# EAGLE board Electrical (EAGLE 9.6.2)
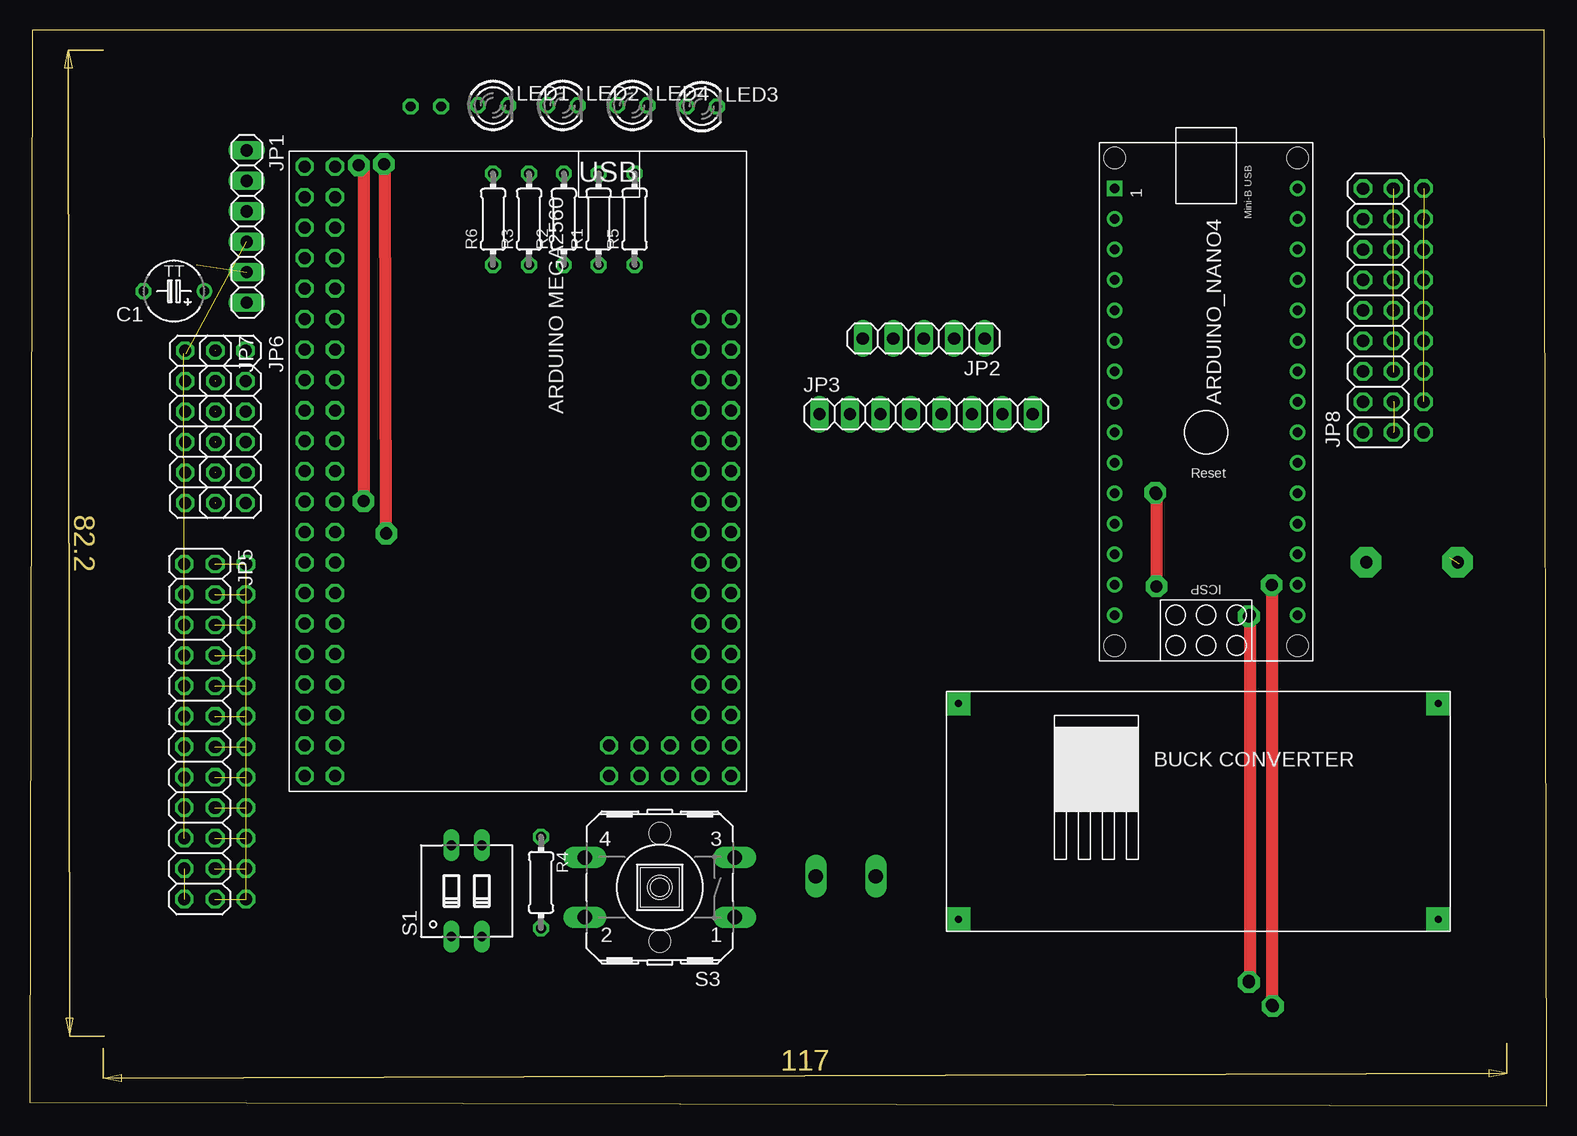
[diagram p0: board, top side]
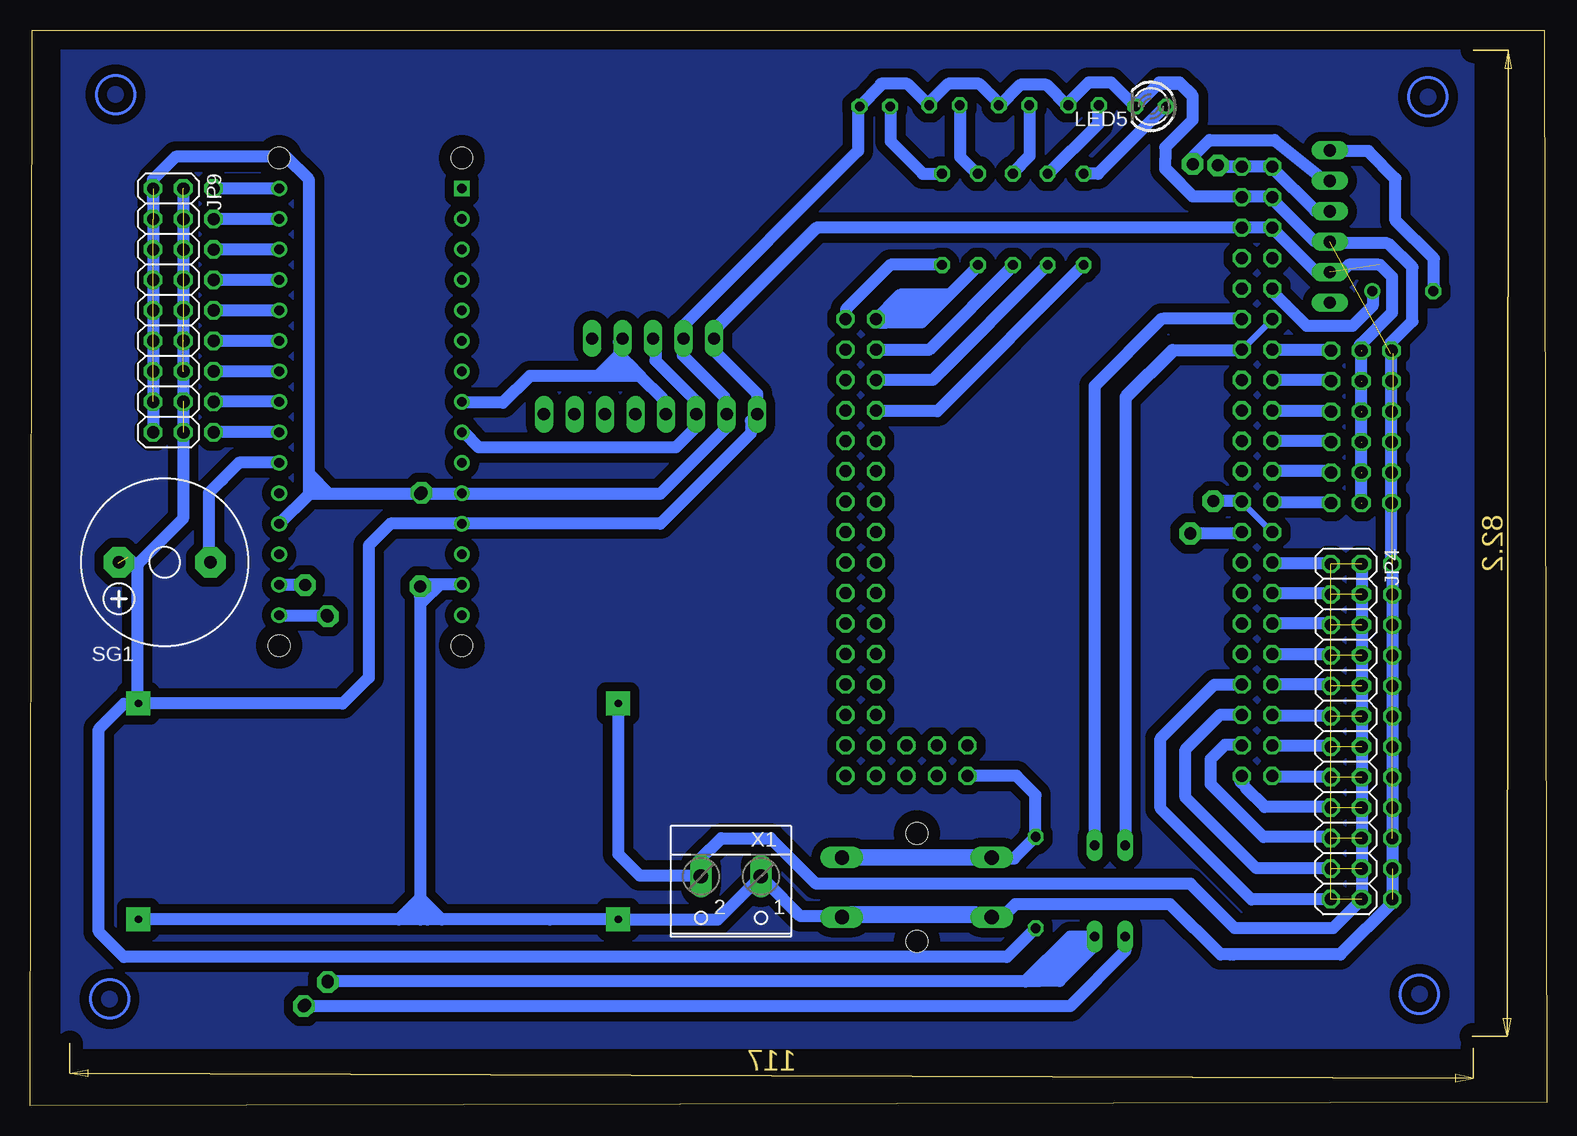
[diagram p1: board, bottom side, seen from below]

Size 126.43 x 89.68 mm. Coordinates in mm from the lower left corner, seen from the top.
Outline: 0,0.3 126.43,0 126.23,89.68 0.2,89.68 0,0.3
Copper layers (1*16): Top 0.035mm / dielectric 1.5mm / Bottom 0.035mm
Design rules "default *": minimum track width 6mil, minimum drill 0.35mm, track to track 30mil, track to pad 30mil, pad to pad 6mil, via to via 6mil, smd to smd 6mil, copper to edge 40mil, drill to drill 6mil, minimum pad ring 10mil, minimum via ring 8mil, stop-mask expansion 4mil, vias tented up to drill 0mil, thermal gap 10mil

## Footprints (pad centres in the part's own frame; a part is rotated, then mirrored left to right if it is on the bottom)
ARDUINO_NANO = drill 0.8 square: 1 -20.32,-7.62 | drill 0.8: 2 -17.78,-7.62; 3 -15.24,-7.62; 4 -12.7,-7.62; 5 -10.16,-7.62; 6 -7.62,-7.62; 7 -5.08,-7.62; 8 -2.54,-7.62; 9 0,-7.62; 10 2.54,-7.62; 11 5.08,-7.62; 12 7.62,-7.62; 13 10.16,-7.62; 14 12.7,-7.62; 15 15.24,-7.62; 16 15.24,7.62; 17 12.7,7.62; 18 10.16,7.62; 19 7.62,7.62; 20 5.08,7.62; 21 2.54,7.62; 22 0,7.62; 23 -2.54,7.62; 24 -5.08,7.62; 25 -7.62,7.62; 26 -10.16,7.62; 27 -12.7,7.62; 28 -15.24,7.62; 29 -17.78,7.62; 30 -20.32,7.62 | hole 1.778: -22.86,-7.62; -22.86,7.62; 17.78,7.62; 17.78,-7.62
TAP5-50 = drill 0.813: + -2.54,0 | drill 0.813 octagon: - 2.54,0
1X06 = drill 1.016 long: 1 -6.35,0; 2 -3.81,0; 3 -1.27,0; 4 1.27,0; 5 3.81,0; 6 6.35,0
1X05 = drill 1.016 long: 1 -5.08,0; 2 -2.54,0; 3 0,0; 4 2.54,0; 5 5.08,0
1X08 = drill 1.016 long: 1 -8.89,0; 2 -6.35,0; 3 -3.81,0; 4 -1.27,0; 5 1.27,0; 6 3.81,0; 7 6.35,0; 8 8.89,0
2X12 = drill 1.016 octagon: 1 -13.97,-1.27; 2 -13.97,1.27; 3 -11.43,-1.27; 4 -11.43,1.27; 5 -8.89,-1.27; 6 -8.89,1.27; 7 -6.35,-1.27; 8 -6.35,1.27; 9 -3.81,-1.27; 10 -3.81,1.27; 11 -1.27,-1.27; 12 -1.27,1.27; 13 1.27,-1.27; 14 1.27,1.27; 15 3.81,-1.27; 16 3.81,1.27; 17 6.35,-1.27; 18 6.35,1.27; 19 8.89,-1.27; 20 8.89,1.27; 21 11.43,-1.27; 22 11.43,1.27; 23 13.97,-1.27; 24 13.97,1.27
2X06 = drill 1.016 octagon: 1 -6.35,-1.27; 2 -6.35,1.27; 3 -3.81,-1.27; 4 -3.81,1.27; 5 -1.27,-1.27; 6 -1.27,1.27; 7 1.27,-1.27; 8 1.27,1.27; 9 3.81,-1.27; 10 3.81,1.27; 11 6.35,-1.27; 12 6.35,1.27
2X09 = drill 1.016 octagon: 1 -10.16,-1.27; 2 -10.16,1.27; 3 -7.62,-1.27; 4 -7.62,1.27; 5 -5.08,-1.27; 6 -5.08,1.27; 7 -2.54,-1.27; 8 -2.54,1.27; 9 0,-1.27; 10 0,1.27; 11 2.54,-1.27; 12 2.54,1.27; 13 5.08,-1.27; 14 5.08,1.27; 15 7.62,-1.27; 16 7.62,1.27; 17 10.16,-1.27; 18 10.16,1.27
LED3MM = drill 0.813 octagon: A -1.27,0; K 1.27,0
0204/7 = drill 0.813 octagon: 1 -3.81,0; 2 3.81,0
DIP02YL = drill 0.813 long: 1 -1.27,-3.81; 2 1.27,-3.81; 3 1.27,3.81; 4 -1.27,3.81
B3F-40XX = drill 1.194 long: 1 -6.248,2.489; 2 6.248,2.489; 3 -6.248,-2.489; 4 6.248,-2.489 | hole 1.803: 0,-4.496; 0,4.496
F/CM12P = drill 1.016 pad 2.54 octagon: + 3.81,0; - -3.81,0
BUCK_CONV = drill 0.6 pad 2 square: IN+ -17,48; IN- -17,30; OUT+ 23,48; OUT- 23,30
MEGA2560_MIKRO = drill 1 octagon: 3V3.1 -26.67,-17.78; 3V3.2 -26.67,-20.32; +5V.1 -29.21,-17.78; +5V.2 -29.21,-20.32; A0 -21.59,15.24; A1 -21.59,12.7; A2 -19.05,15.24; A3 -19.05,12.7; A4 -16.51,15.24; A5 -16.51,12.7; A6 -13.97,15.24; A7 -13.97,12.7; A8 -11.43,15.24; A9 -11.43,12.7; A10 -8.89,15.24; A11 -8.89,12.7; A12 -6.35,15.24; A13 -6.35,12.7; A14 -3.81,15.24; A15 -3.81,12.7; AREF.1 -24.13,-17.78; D2 -19.05,-17.78; D3 -19.05,-20.32; D4 -16.51,-17.78; D5 -16.51,-20.32; D6 -13.97,-17.78; D7 -13.97,-20.32; D8 -11.43,-17.78; D9 -11.43,-20.32; D10 -8.89,-17.78; D11 -8.89,-20.32; D12 -6.35,-17.78; D13 -6.35,-20.32; D14 -3.81,-17.78; D15 -3.81,-20.32; D16 -1.27,-17.78; D17 -1.27,-20.32; D18 1.27,-17.78; D19 1.27,-20.32; D20 3.81,-17.78; D21 3.81,-20.32; D22 6.35,-17.78; D23 6.35,-20.32; D24 8.89,-17.78; D25 8.89,-20.32; D26 11.43,-17.78; D27 11.43,-20.32; D28 13.97,-17.78; D29 13.97,-20.32; D30 16.51,-17.78; D31 16.51,-20.32; D32 -1.27,15.24; D33 -1.27,12.7; D34 1.27,15.24; D35 1.27,12.7; D36 3.81,15.24; D37 3.81,12.7; D38 6.35,15.24; D39 6.35,12.7; D40 8.89,15.24; D41 8.89,12.7; D42 11.43,15.24; D43 11.43,12.7; D44 13.97,15.24; D45 13.97,12.7; D46 16.51,15.24; D47 16.51,12.7; D48 16.51,10.16; D49 13.97,10.16; D50 16.51,7.62; D51 13.97,7.62; D52 16.51,5.08; D53 13.97,5.08; GND.1 -31.75,-17.78; GND.2 -31.75,-20.32; RST -24.13,-20.32; RX -21.59,-17.78; TX -21.59,-20.32; VIN.1 -34.29,-17.78; VIN.2 -34.29,-20.32
W237-102 = drill 1.194 long: 1 -2.5,-1.27; 2 2.5,-1.27

## Placement (x,y rotation side)
ARDUINO_NANO4  [ARDUINO_NANO]  98.04,56.14 270 top
C1  [TAP5-50]  12,67.9 180 top
JP1  [1X06]  18.07,73.29 270 top
JP2  [1X05]  74.5,63.96 180 top
JP3  [1X08]  74.7,57.65 0 top
JP4  [2X12]  16.73,31.19 270 bottom
JP5  [2X12]  14.13,31.19 270 top
JP6  [2X06]  16.7,56.6 270 top
JP7  [2X06]  14.2,56.6 270 top
JP8  [2X09]  112.4,66.3 90 top
JP9  [2X09]  114.9,66.3 270 bottom
LED1  [LED3MM]  38.6,83.4 0 top
LED2  [LED3MM]  44.4,83.4 0 top
LED3  [LED3MM]  56,83.3 0 top
LED4  [LED3MM]  50.2,83.4 0 top
LED5  [LED3MM]  33,83.3 180 bottom
R1  [0204/7]  47.4,73.9 90 top
R2  [0204/7]  44.5,73.9 90 top
R3  [0204/7]  41.6,73.9 90 top
R4  [0204/7]  42.6,18.6 270 top
R5  [0204/7]  50.4,73.9 90 top
R6  [0204/7]  38.6,73.9 90 top
S1  [DIP02YL]  36.4,17.9 0 top
S3  [B3F-40XX]  52.5,18.2 180 top
SG1  F/CM12P  [F/CM12P]  115.2,45.3 180 bottom
U$1  BUCK_CONV  [BUCK_CONV]  94.39,-14.47 0 top
U$2  MEGA2560_MIKRO  [MEGA2560_MIKRO]  43.2,44 270 top
X1  [W237-102]  68,17.85 180 bottom

## Library data of the parts
ARDUINO_NANO4 = ArduinoNanoV30
C1 = rcl; SPICEPREFIX: C
JP1-JP9 = pinhead
LED1-LED5 = led
R1-R6 = rcl; SPICEPREFIX: R
S1 = switch-dil; OC_FARNELL: unknown; OC_NEWARK: unknown
S3 = switch-omron; MF: OMRON COMPONENTS USA; MPN: B3F-4000; OC_FARNELL: 176434; OC_NEWARK: 36K3105
SG1 = buzzer; OC_FARNELL: unknown; OC_NEWARK: unknown
U$1 = KRSBI COMPONENT
U$2 = MIKRO_MEGA2560
X1 = con-wago-500; MPN: 237-102; OC_FARNELL: unknown; OC_NEWARK: 70K9898

## Nets
GND: ARDUINO_NANO4.14 ARDUINO_NANO4.19 JP1.4 JP2.4 JP3.2 JP5.1 JP5.3 JP5.5 JP5.7 JP5.9 JP5.11 JP5.13 JP5.15 JP5.17 JP5.19 JP5.21 JP5.23 JP9.1 JP9.3 JP9.5 JP9.7 JP9.9 JP9.11 JP9.13 JP9.15 JP9.17 U$1.IN- U$1.OUT- X1.1
N$1: JP6.1 JP7.2
N$2: JP4.8
N$3: JP6.3 JP7.4
N$4: JP4.3 JP5.4
N$5: JP6.5 JP7.6
N$6: JP6.7 JP7.8
N$7: JP6.9 JP7.10
N$8: JP6.11 JP7.12
N$9: ARDUINO_NANO4.9 JP2.3 JP3.3
N$17: JP4.5 JP5.6
N$18: JP4.7 JP5.8
N$19: JP4.9 JP5.10
N$20: JP4.11 JP5.12
N$21: JP4.13 JP5.14
N$22: JP4.15 JP5.16
N$23: JP4.17 JP5.18
N$24: JP4.19 JP5.20
N$25: JP4.21 JP5.22
N$27: ARDUINO_NANO4.8 JP2.2 JP3.4
N$31: ARDUINO_NANO4.22 JP8.2
N$32: ARDUINO_NANO4.23 JP8.4
N$33: ARDUINO_NANO4.24 JP8.6
N$34: ARDUINO_NANO4.25 JP8.8
N$35: ARDUINO_NANO4.26 JP8.10
N$36: ARDUINO_NANO4.27 JP8.12
N$37: ARDUINO_NANO4.28 JP8.14
N$38: ARDUINO_NANO4.29 JP8.16
N$39: ARDUINO_NANO4.30 JP8.18
N$40: S1.4 U$2.TX
N$41: S1.3 U$2.RX
N$42: ARDUINO_NANO4.17 S1.1
N$43: ARDUINO_NANO4.16 S1.2
VCC: ARDUINO_NANO4.12 JP1.5 JP2.5 JP3.1 JP8.1 JP8.3 JP8.5 JP8.7 JP8.9 JP8.11 JP8.13 JP8.15 JP8.17 JP9.2 JP9.4 JP9.6 JP9.8 JP9.10 JP9.12 JP9.14 JP9.16 JP9.18 U$1.OUT+
VDD: JP4.1 JP4.23 JP5.2 JP5.24 U$1.IN+ X1.2
VIN: ARDUINO_NANO4.15

## Tracks (layer width: path | path; a pad name or v marks a point on that pad's centre or on a via)
A
  pour Bottom: 6.1,88 6.1,4.8 123.8,4.8 123.8,88
GND  (via drill 0.35, 1, 1 pad 1.8)  (19 unrouted)
  Top 1.016: v93.9,51 v93.9,43.4
  Bottom 0.508: JP1.4 19.17,72.02 22.95,75.8 29.1,75.8 31.5,78.2 31.5,78.1 31.9,78.5 31.9,79.8 29.6,82.1 29.6,83.9 30.6,84.9 32.8,84.9 34.2,83.5 34.2,83.2 34.5,83.2 36.6,85.3 38.1,85.3 40,83.4 41.7,85.1 43.8,85.1 45.5,83.4 45.7,83.4 45.7,83.6 47.2,85.1 49.9,85.1 51.4,83.6 53.1,85.3 55.2,85.3 57.3,83.2 57.3,79.7 71.96,65.04 JP2.4 | 75.6,15.53 83.1,15.53 | U$1.IN- 92.1,15.53
  Bottom 1.016: JP5.1 JP5.23 | X1.1 69.09,15.53 75.6,15.53 U$1.IN- 83.1,15.53 92.1,15.53 | JP9.17 JP9.1 116.17,77.23 114.3,79.1 105.1,79.1 103.18,77.18 103.18,52.68 | JP2.4 72.03,63.89 72.03,62.57 68.55,59.09 68.55,57.85 JP3.2 68.35,56.55 73.9,51 v93.9,51 101.5,51 | 12.8,62.7 13,62.7 | 92.1,15.53 93.3,15.53 | 93.3,15.53 93.9,15.53 | 93.9,15.53 95.7,15.53 | 95.7,15.53 U$1.OUT- | ARDUINO_NANO4.14 92.3,43.44 | 93.9,17.33 93.9,42.1 93.64,42.1 | 93.9,17.33 93.9,15.53 | 92.1,15.53 93.9,17.33 | 95.7,15.53 94.87,16.37 | 94.87,16.37 93.9,17.33 | 93.3,15.53 94.14,16.37 94.87,16.37 | ARDUINO_NANO4.19 103.18,51 | 101.5,51 103.18,51 | 103.18,51 103.18,52.68 | 101.5,51 103.18,52.68 | 93.64,42.1 92.3,43.44 | 93.64,42.1 93.9,42.36 v93.9,43.3 v93.9,43.4 93.86,43.44 92.3,43.44
N$1  (1 unrouted)
N$3  (1 unrouted)
N$4  (1 unrouted)
N$5  (1 unrouted)
N$6  (1 unrouted)
N$7  (1 unrouted)
N$8  (1 unrouted)
N$9
  Bottom 1.016: JP2.3 74.3,63.76 74.3,62.12 70.92,58.74 70.92,57.68 JP3.3 70.92,57.62 70.92,56.56 72.6,54.88 89.02,54.88 90.28,56.14 ARDUINO_NANO4.9
N$10
  Bottom 1.016: 18,63 23,63 23.1,63.1
N$11
  Bottom 1.016: 18,60.5 22.9,60.5
N$12
  Bottom 1.016: 18,57.9 22.9,57.9 23,58
N$13
  Bottom 1.016: 18,55.4 22.9,55.4
N$14
  Bottom 1.016: 17.9,52.8 18,52.9 22.9,52.9
N$15
  Bottom 1.016: 17.9,50.1 18,50.2 18,50.3 23,50.3
N$16
  Bottom 1.016: 15.4,63 15.5,62.9 15.5,50.3 15.4,50.2
N$17  (1 unrouted)
N$18  (1 unrouted)
N$19  (1 unrouted)
N$20  (1 unrouted)
N$21  (1 unrouted)
N$22  (1 unrouted)
N$23  (1 unrouted)
N$24  (1 unrouted)
N$25  (1 unrouted)
N$26
  Bottom 1.016: 15.4,45.2 15.4,17.2
N$27
  Bottom 1.016: JP3.4 73.66,57.88 73.66,58.94 75.56,60.84 | 76.61,61.89 77.34,62.62 77.34,63.66 JP2.2 77.07,63.93 77.07,62.87 78.05,61.89 | 76.61,61.89 75.56,60.84 | 75.56,60.84 77.8,60.84 | 77.8,60.84 78.8,60.84 | 78.8,60.84 84.76,60.84 87,58.6 90.34,58.6 ARDUINO_NANO4.8 | 78.8,60.84 78.8,61.14 78.05,61.89 | 76.61,61.89 77,61.89 | 77,61.89 78.05,61.89 | 77.8,60.84 77,61.64 77,61.89
N$28
  Bottom 1.016: 18,45.2 22.9,45.2 23,45.3
N$29
  Bottom 1.016: 18,42.6 18.1,42.7 22.9,42.7
N$30
  Bottom 1.016: 18,40 18,40.2 22.9,40.2
N$31
  Bottom 1.016: ARDUINO_NANO4.22 JP8.2
N$32
  Bottom 1.016: ARDUINO_NANO4.23 JP8.4
N$33
  Bottom 1.016: ARDUINO_NANO4.24 JP8.6
N$34
  Bottom 1.016: ARDUINO_NANO4.25 JP8.8
N$35
  Bottom 1.016: ARDUINO_NANO4.26 JP8.10
N$36
  Bottom 1.016: ARDUINO_NANO4.27 JP8.12
N$37
  Bottom 1.016: ARDUINO_NANO4.28 JP8.14
N$38
  Bottom 1.016: ARDUINO_NANO4.29 JP8.16
N$39
  Bottom 1.016: ARDUINO_NANO4.30 JP8.18
N$40
  Bottom 0.508: U$2.TX 25.47,63 30.7,63 35.1,58.6 35.1,21.74 S1.4
N$41
  Bottom 0.508: U$2.RX 32.11,65.59 37.7,60 37.7,21.74 S1.3
N$42  (via drill 0.35, 1, 1 pad 1.8)
  Top 1.016: v103.5,43.4 103.5,8.7 v103.9,8.3
  Bottom 1.016: S1.1 35.13,12.89 39.72,8.3 v103.6,8.3 v103.9,8.3 | v103.5,43.4 105.62,43.4 ARDUINO_NANO4.17
N$43  (via drill 0.35)
  Top 1.016: v101.8,10.3 101.7,10.4 101.7,40.72 v101.56,40.86
  Bottom 1.016: v101.8,10.3 101.8,10.35 43.45,10.35 39.71,14.09 S1.2 | ARDUINO_NANO4.16 105.62,40.86 v101.56,40.86
N$44
  Bottom 1.016: 18,37.6 22.9,37.6
N$45
  Bottom 1.016: 18,35.1 23,35.1
N$46
  Bottom 1.016: 18,32.5 23,32.5
N$47
  Bottom 1.016: 18,29.9 18.1,30 23,30
N$48
  Bottom 1.016: 18,27.4 22.9,27.4 23,27.5
N$49
  Bottom 1.016: 14,70.1 16.5,70.1 17.2,69.4 18.4,69.4
N$50
  Bottom 1.016: 13.3,71.9 18.3,71.9
N$51
  Bottom 1.016: 18,24.9 23.5,24.9 25.1,26.5
N$52
  Bottom 1.016: 17.9,22.2 18.1,22.4 23.6,22.4 28,26.8 28,28.9 26.8,30.1 25.5,30.1 25.4,30
N$53
  Bottom 1.016: 18,19.8 24.2,19.8 30.1,25.7 30.1,29.7 27.2,32.6 25.4,32.6
N$54
  Bottom 1.016: 18,17.2 24.6,17.2 32.2,24.8 32.2,30.6 27.7,35.1 25.4,35.1
N$55
  Bottom 1.016: 13,45 13,63.6 11.2,65.4 11.2,69.9 13.1,71.8
N$56
  Bottom 1.016: 14.5,68 14.5,66.7 16.2,65 20,65 22.9,67.9
N$57
  Bottom 1.016: 22.9,68.2 23,68.1
N$58
  Bottom 1.016: 9.4,68.3 9.4,70.6 12.6,73.8 12.6,77.3 14.8,79.5
N$59
  Bottom 1.016: 22.8,75.8 25.4,75.8 25.5,75.7
N$60
  Bottom 1.016: 18.4,79.6 14.87,79.6
N$61  (via drill 1 pad 1.8)
  other vias: 27.4,78.4
N$62
  Bottom 1.016: 22.9,73.1 23,73.2 | 22.9,73.2 23,73.2 | 23,73.2 60.9,73.2 69.5,64.6 69.5,63.7
N$63
  Bottom 1.016: 19.1,69.6 19.2,69.5 22.9,73.2 22.9,73.3
N$64
  Bottom 1.016: 48.9,83.4 48.9,79.1 47.4,77.6
N$65
  Bottom 1.016: 43.1,83.4 43.1,79.2 44.5,77.8
N$66
  Bottom 1.016: 17.6,72 18.8,72 18.9,72.1 19.4,72.1 23,75.7
N$67
  Bottom 1.016: 17.8,69.6 18.3,69.6
N$68
  Bottom 1.016: 37.4,83.3 37.4,81.8 41.6,77.6
N$69
  Bottom 1.016: 54.7,83.3 54.7,80.4 52,77.7 50.5,77.7
N$70
  Bottom 0.508: 39.2,84.2 39.2,84 39.9,83.3
  Bottom 1.016: 39.9,83.3 41.7,85.1 43.9,85.1 45.7,83.3
N$71
  Bottom 1.016: 45.7,83.6 47.3,85.2 49.9,85.2 51.6,83.5 51.6,83.4
N$72
  Bottom 1.016: 51.5,83.4 53.3,85.2 55.5,85.2 55.5,85.1 57.3,83.3
N$73
  Bottom 1.016: 50.4,70.1 54.7,70.1 58.4,66.4 58.4,65.5
N$74
  Bottom 1.016: 47.3,70.1 49.8,67.6 53.9,67.6 56,65.5
N$75
  Bottom 1.016: 44.4,70.1 51.5,63 56,63
N$76
  Bottom 1.016: 41.6,70.1 51.2,60.5 56,60.5
N$77
  Bottom 1.016: 49.9,67.5 52.1,65.3 55,65.3 | 55.7,65.3 55,65.3 | 55,65.3 53.3,67 51.1,67 52.1,66 53.3,66
N$78
  Bottom 1.016: 65.5,19 65.5,19.1
N$79
  Bottom 1.016: 12.8,17 17.2,12.6 26.4,12.6
N$80
  Bottom 1.016: 26.1,12.6 27.2,12.6 31.4,16.8 44.3,16.8 45.4,15.7 58.8,15.7 58.9,15.8 62.2,15.8 65,18.6
N$81
  Bottom 1.016: 58.7,20.5 58.9,20.7 58.7,20.9 46.4,20.9 46.1,20.6 44.4,20.6 42.6,22.4 42.6,25.9 44.2,27.5 48.5,27.5
N$82
  Bottom 1.016: 42.6,14.8 45,12.4 118.6,12.4 120.7,14.5 120.7,31.4 118.6,33.5 117.1,33.5
N$83
  Bottom 1.016: 37.6,13.4 40.6,10.4 42.3,10.4 | 43.9,10.4 42.3,10.4 | 42.3,10.4 39.2,13.5 38.3,13.5 40.8,11 41.2,11
N$84
  Bottom 1.016: 116.2,76.9 116.2,75.2
N$85  (via drill 1)
  other vias: 101.7,40.9
N$86
  Bottom 1.016: 18.4,77.1 18.1,77.1
N$87  (via drill 1 pad 1.8)
  Bottom 1.016: 25.4,47.7 v29.7,47.7
N$88
  Bottom 1.016: 105.7,53.6 109,53.6 109.5,53.1 110.4,52.2 111.5,51.1 111.5,45.3
N$89
  Bottom 1.016: 18.2,74.6 19.3,74.6 22.9,78.2 | 22.9,78.2 23,78.3 23,78.4 22.9,78.5 | 22.9,78.4 22.9,78.3 | 22.9,78.3 22.9,78.2 | 22.9,78.3 26.4,78.3
N$90
  Bottom 1.016: 17.9,74.4 18.2,74.7
N$91  (via drill 0.7)
  Top 1.016: v29.7,47.9 29.6,78.3 v29.6,78.5
  Bottom 1.016: v29.6,78.5 29.6,79 28.1,80.5 22.7,80.5
N$92
  Bottom 1.016: 25.5,65.6 32,65.6
N$93
  Bottom 0.508: 23.3,65.1 25.4,63
  Bottom 1.016: 25.4,63 31.2,63 35.1,59.1 35.1,21.4
N$94
  Bottom 1.016: 32.1,65.6 37.7,60 37.7,21.3
N$95
  Bottom 1.016: 25.5,75.8 29.5,75.8 31.15,77.45 31.7,78
N$96  (via drill 1)
  other vias: 101.6,10.4
N$97
  Bottom 1.016: 57.4,83.3 57.4,79.6 72.2,64.8 72.2,63.7
N$98
  Bottom 1.016: 31.7,83.4 37.4,77.7 38.8,77.7
N$99
  Bottom 1.016: 31.8,78.1 31.8,78.9 | 31.8,78.9 31.8,79.9 29.5,82.2 29.5,84.2 30.6,85.3 32.3,85.3 34.3,83.3 36.3,85.3 38.2,85.3 39.45,84.05 40,83.5 | 31.8,78.9
N$100
  Bottom 1.016: 18.5,77.1 22.6,80.4
N$101
  Bottom 1.016: 38.6,70.1 50.8,57.9 56,57.9
N$102  (via drill 1)
  Bottom 1.016: v103.5,8.4 103.5,8.6
N$103  (via drill 1 pad 1.8)
  Bottom 1.016: 101.6,10.2 v101.6,10.3 101.6,10.5
N$104  (via drill 0.7, 1 pad 1.8)
  Top 1.016: v27.8,50.3 v27.8,50.4 27.8,78.1 v27.5,78.4
  Bottom 0.508: 22.8,47.7 25.5,50.4 27.7,50.4 v27.8,50.3
  Bottom 1.016: v27.5,78.4 27.5,78.3 25.4,78.3 | 25.3,50.4 v27.8,50.4 27.9,50.4
N$105
  Bottom 1.016: 70.5,20.4 70.5,18.8
N$106
  Bottom 1.016: 46.3,20.8 46.3,20.5
N$107
  Bottom 1.016: 46.5,20.5 58.3,20.5
N$108
  Bottom 1.016: 46.7,15.9 47.3,15.9 47.5,16.1 58.1,16.1 58.3,15.9
N$109  (via drill 1 pad 1.8)
  other vias: 29.5,78.5
N$110  (via drill 1 pad 1.8)
  other vias: 93.8,51.1
N$111  (via drill 1 pad 1.8)
  other vias: 101.6,40.8
N$112
  Bottom 1.27: 25.4,27 25.4,27.5
VCC  (18 unrouted)
  Bottom 0.508: JP1.5 19.08,69.48 23,73.4 60.3,73.4 69.42,64.28 69.42,62.96
  Bottom 1.016: ARDUINO_NANO4.12 90.5,48.52 | JP9.2 113.67,76.42 JP8.1 | JP2.5 69.42,62.96 65.81,59.35 JP3.1 66.34,57.12 66.34,56.06 73.88,48.52 ARDUINO_NANO4.12 | 15.5,62.5 15.5,63.3 | 15.6,63.4 15.5,63.3 | 13.9,70.1 12.9,69.1 12.9,66.1 15.5,63.5 15.5,63.3 | JP8.1 113.87,55.94 | ARDUINO_NANO4.12 96.38,48.52 98.2,46.7 98.2,35.7 100.37,33.53 U$1.OUT+ 117.49,33.63 117.49,44.89 118.3,45.7 | JP8.1 113.67,48.93 117.4,45.2 119.1,45.2
VDD  (3 unrouted)
  Bottom 1.016: JP5.24 17.82,14.8 26,14.8 29.7,18.5 60.9,18.5 64.7,22.3 68.8,22.3 70.6,20.5 70.6,19.4 70.5,19.3 | 70.5,19.32 70.5,19.3 | 70.5,19.3 X1.2 | U$1.IN+ 77.39,20.99 75.6,19.2 70.6,19.2 70.5,19.3
(copper drawn outside any net)
  shapes: Bottom circle x4